# Altium PCB UpperPlumbingBayBoard.PcbDoc (part 1 of 2)
Units mm, origin at the board's own origin, x right, y up, seen from the top; angles counter-clockwise.
Board outline 109.22 x 106.86 mm, 4 copper layers (Top Layer, GND, PWR, Bottom Layer), stack 1.586 mm thick; 63 components, 45 nets, 242 pads, 158 vias.
Unrouted connection lines stored in the file: 2.
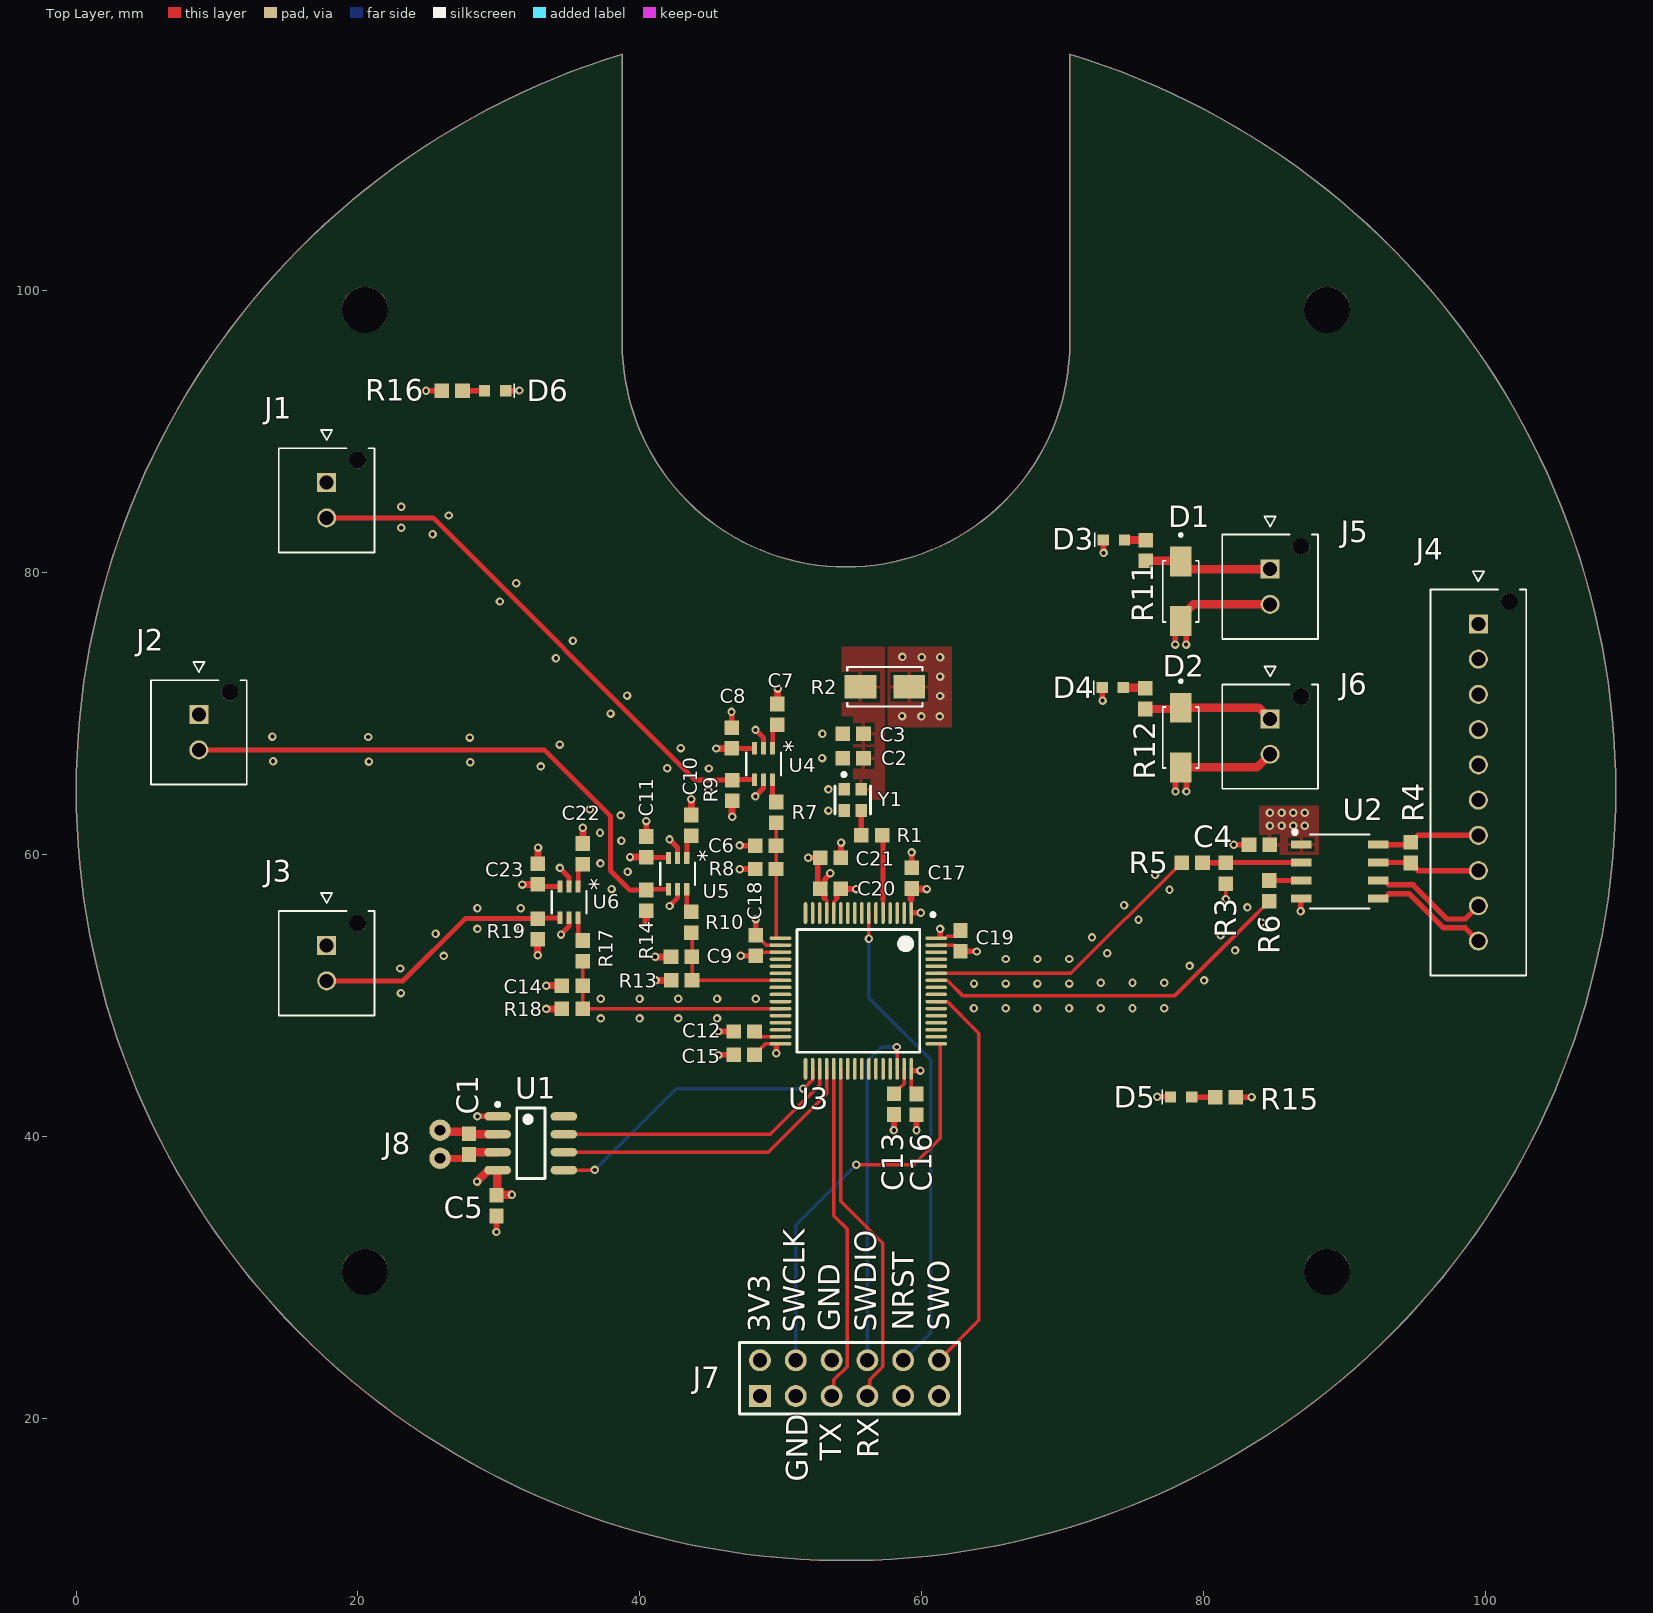
[diagram p0: Top Layer view]
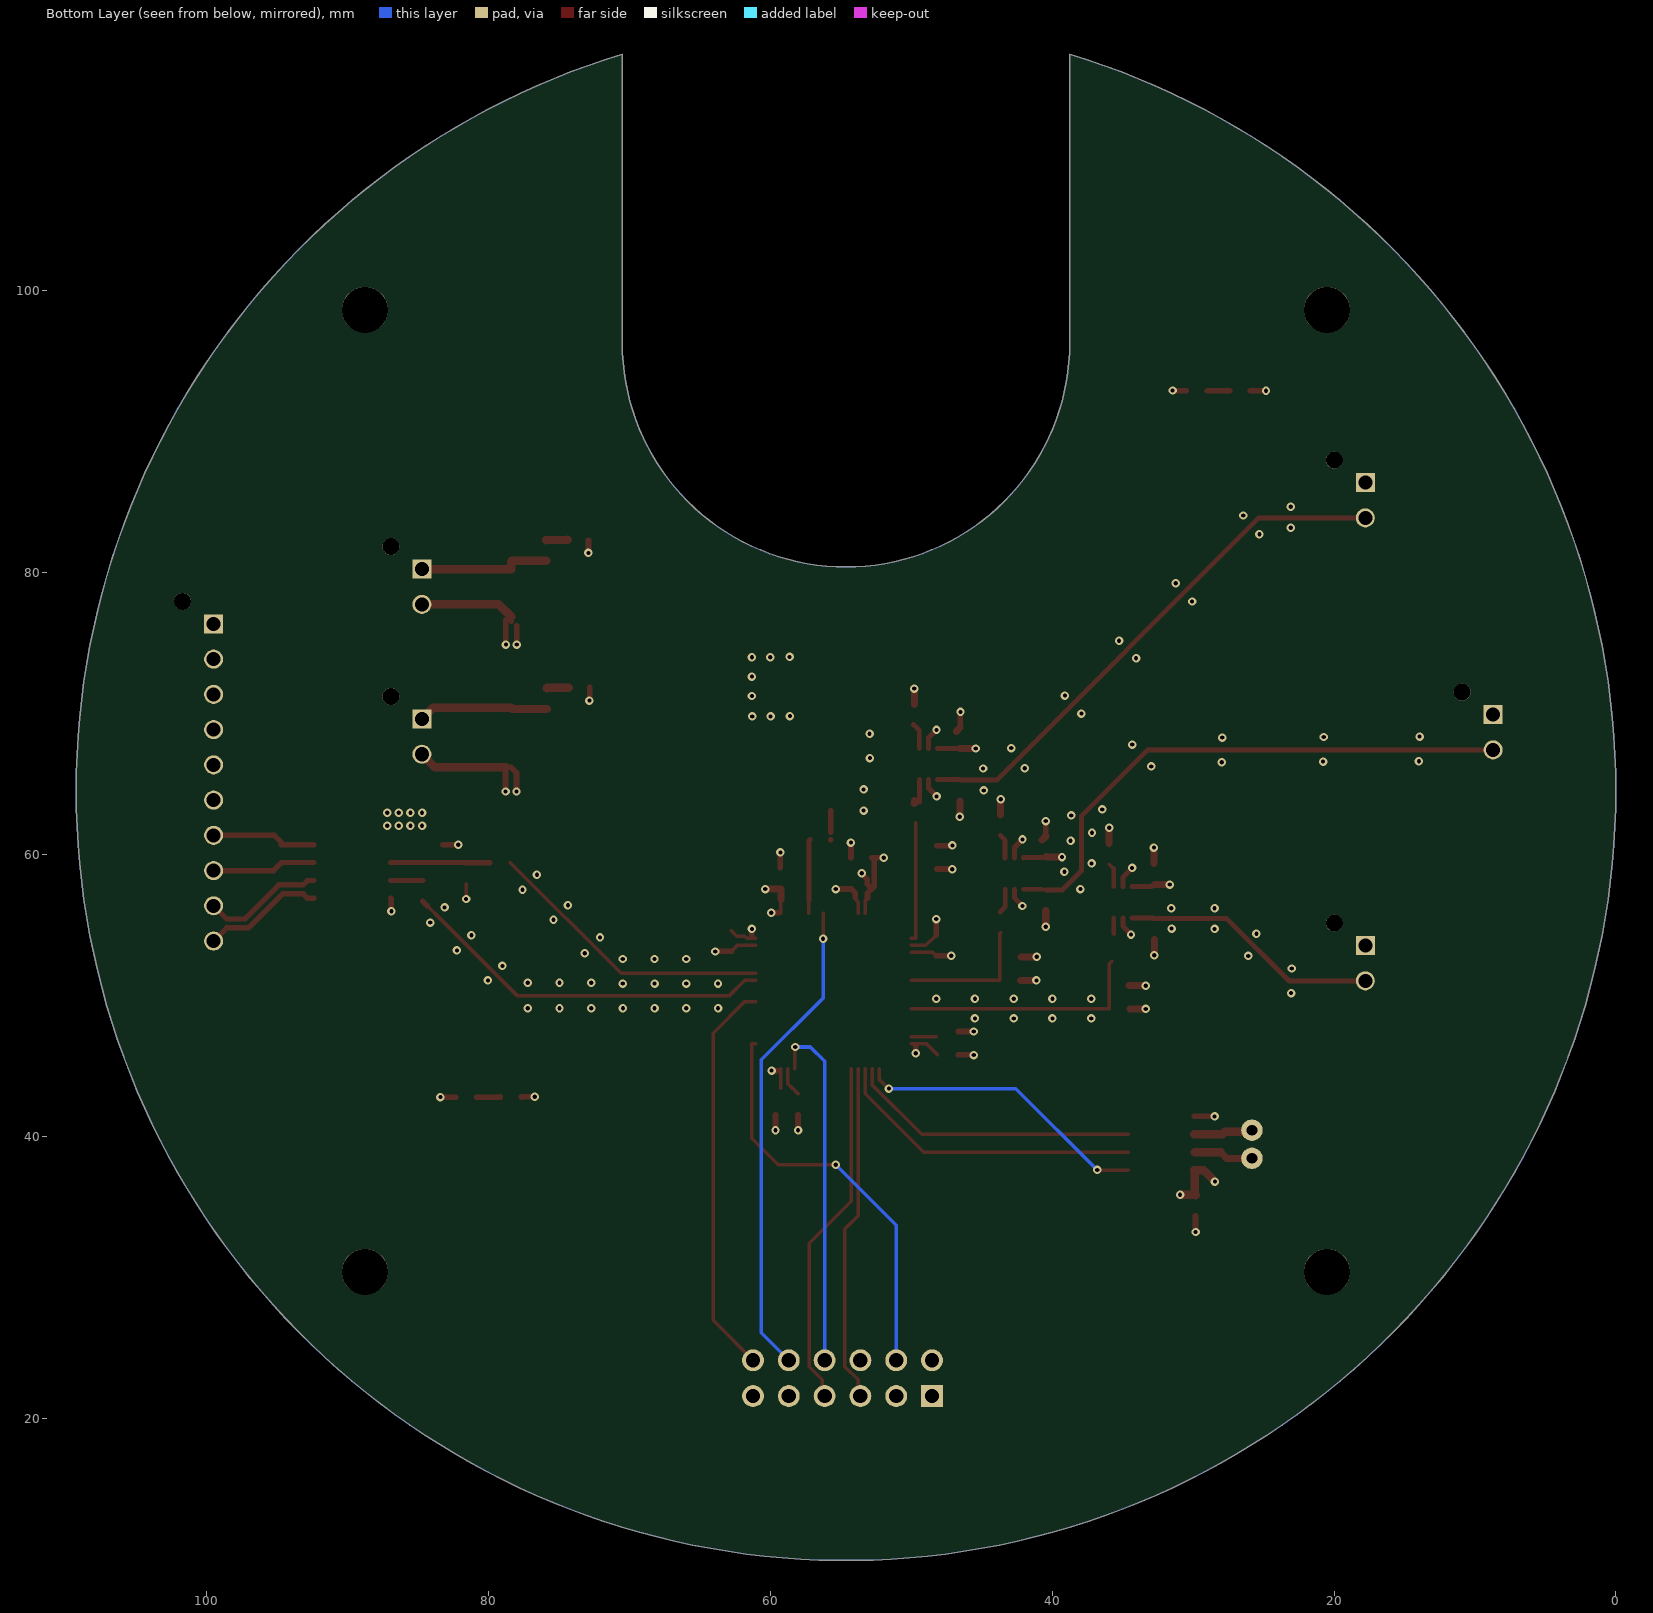
[diagram p1: Bottom Layer view, seen from below]
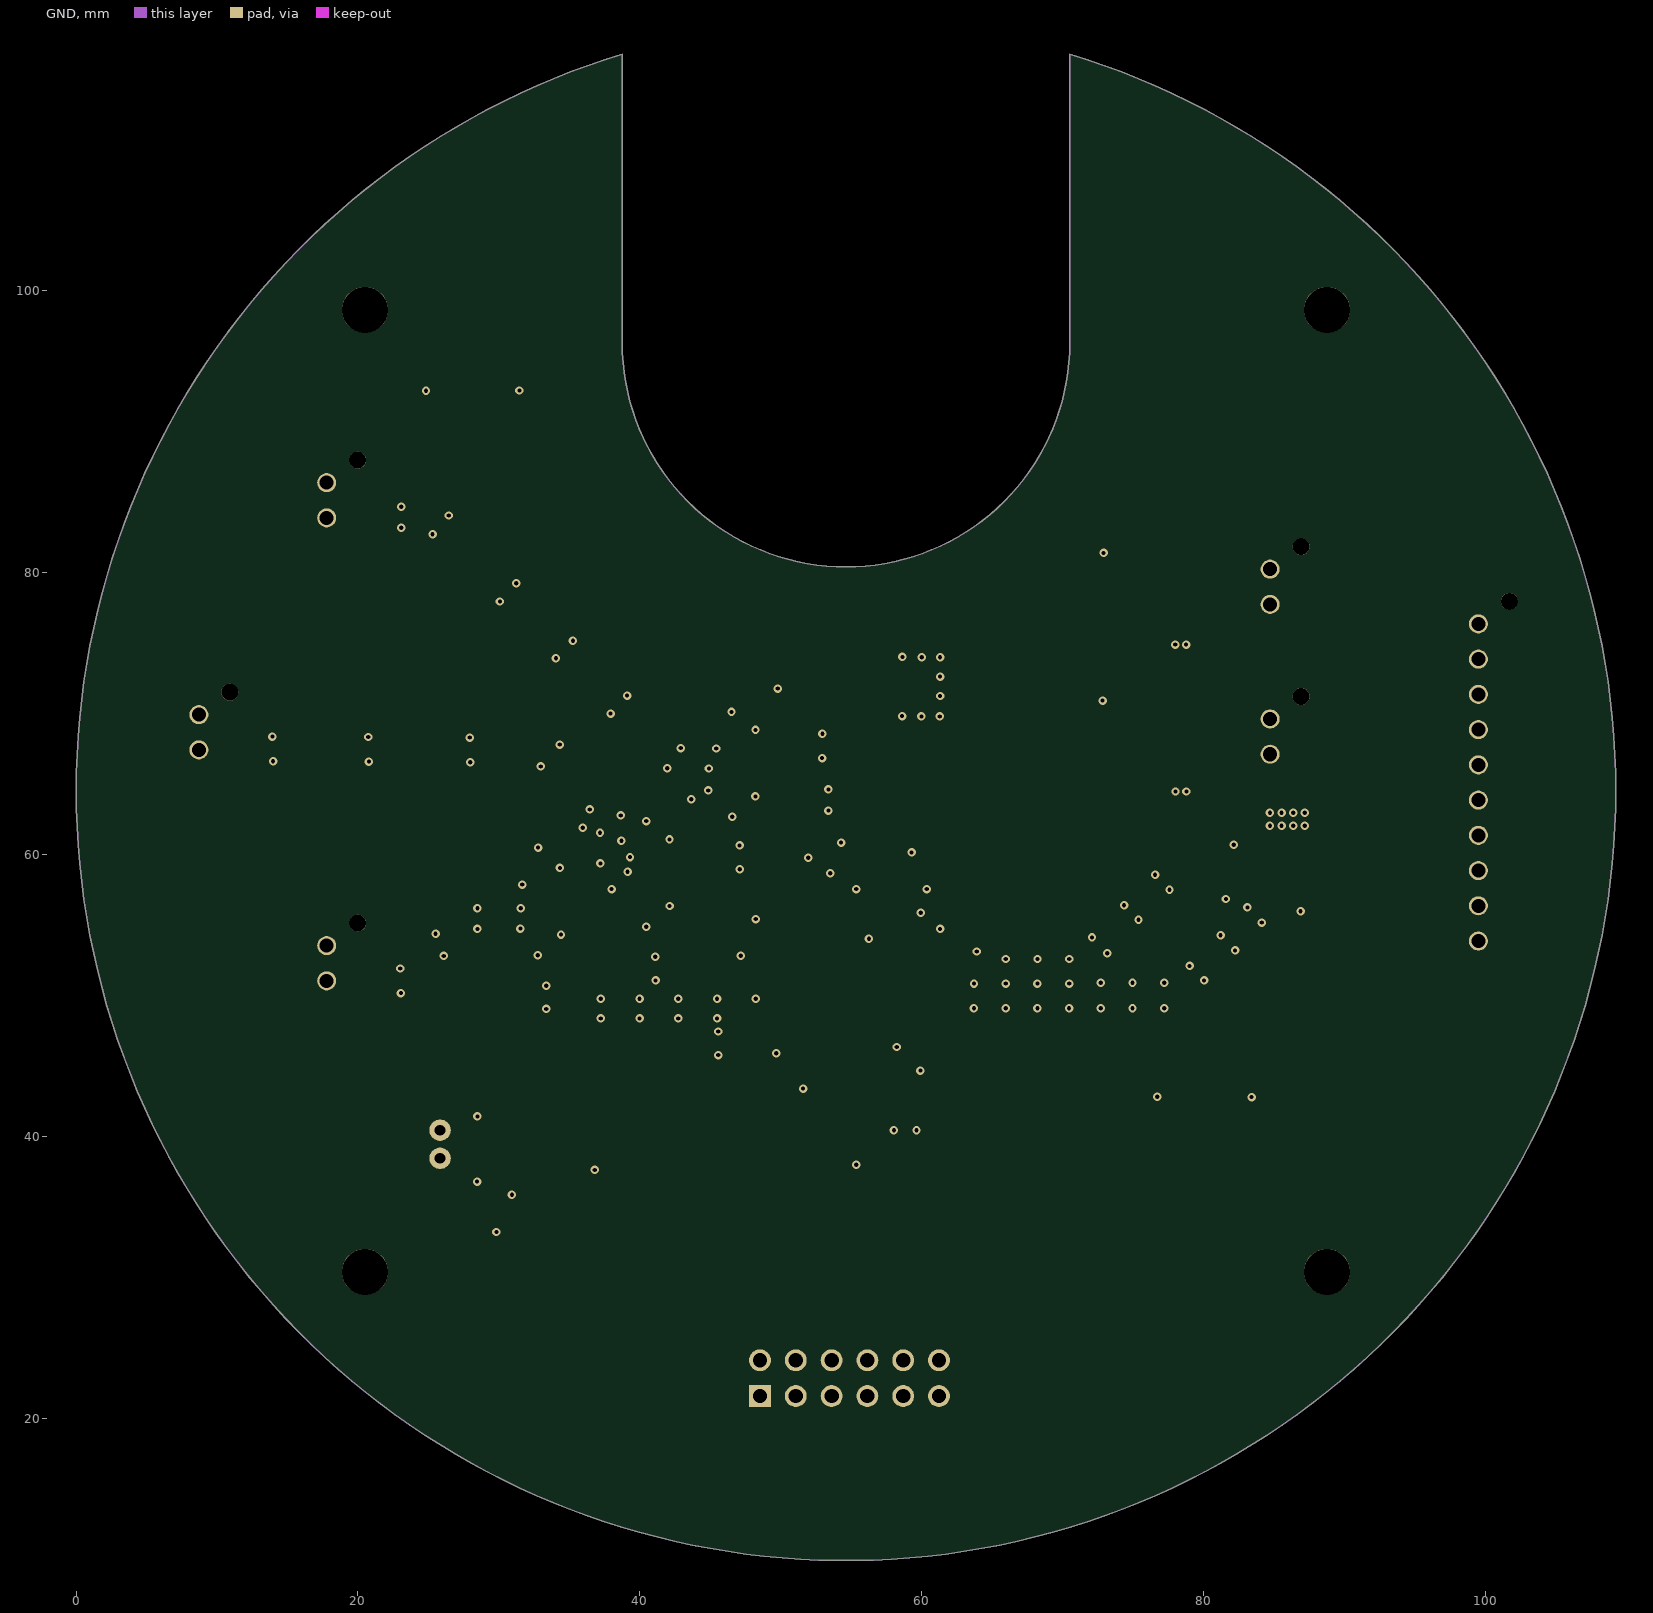
[diagram p2: GND]
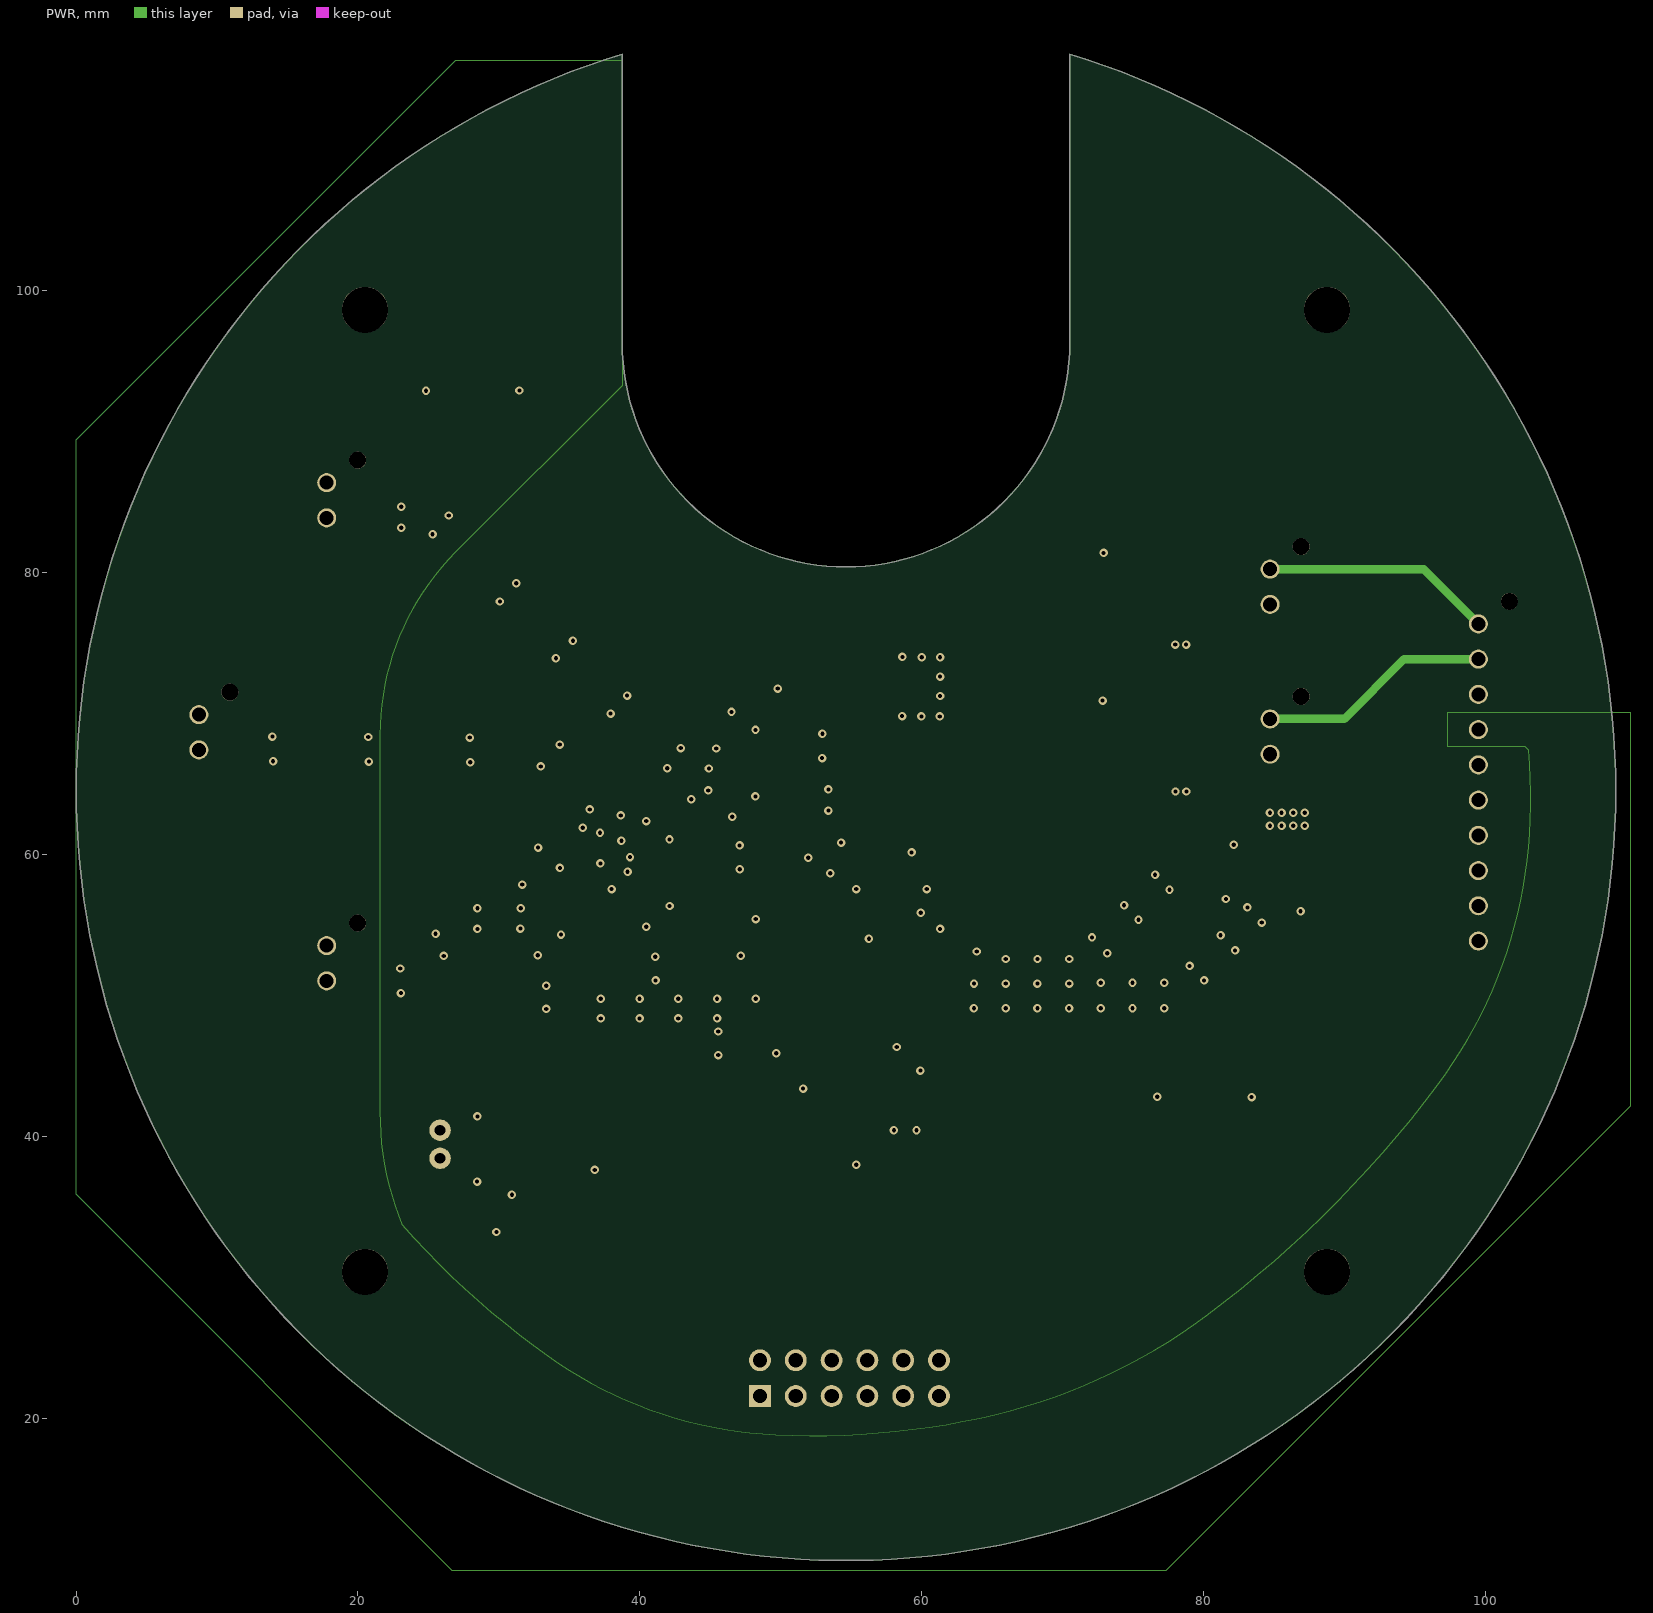
[diagram p3: PWR]

## Layer stack, top to bottom
Top Solder: solder mask 0.0127, Solder Resist, Dk 3.8
Top Layer: signal copper 0.035
Dielectric 1: prepreg 0.2104, 7628, Dk 4.4
GND: signal copper 0.0152
Core: core 1.065, FR-4, Dk 4.6
PWR: signal copper 0.0152
Dielectric 2: prepreg 0.2104, 7628, Dk 4.4
Bottom Layer: signal copper 0.035
Bottom Solder: solder mask 0.0127, Solder Resist, Dk 3.8

## Board outline
38.748,116.755 ccw(c54.623,64.503) 70.498,116.755 70.498,96.253 cw(c54.623,96.253) 38.748,96.253

## Design rules (kind name [scope] priority, off if disabled: settings)
BoardOutlineClearance [All] p1: gap=0.2 ignorepadtopadclearanceinfootprint=FALSE
Clearance [All] p1: gap=0.2 ignorepadtopadclearanceinfootprint=TRUE
ComponentClearance [All] p1: gap=0.102 collisioncheckmode=3 verticalgap=0.102 showdistances=TRUE
DiffPairsRouting [All] p1: maxlimit=0.254 minlimit=0.254 mostfreqgap=0.254 toplayer_minwidth=0.381 toplayer_maxwidth=0.381 toplayer_prefwidth=0.381 midlayer1_minwidth=0.381 midlayer1_maxwidth=0.381 midlayer1_prefwidth=0.381 midlayer2_minwidth=0.381 midlayer2_maxwidth=0.381 midlayer2_prefwidth=0.381 bottomlayer_minwidth=0.381 bottomlayer_maxwidth=0.381 bottomlayer_prefwidth=0.381 maxuncoupledlength=12.7
Height [All] p1: minheight=0 maxheight=1816.048 prefheight=12.7
HoleSize [All] p1: absolutevalues=TRUE maxlimit=6.3 minlimit=0.2 maxpercent=80.000 minpercent=20.000
HoleToHoleClearance [All] p1: gap=0.25 allowstackedmicrovias=FALSE
MinimumAnnularRing [All] p1: minimumring=0.076
MinimumSolderMaskSliver [All] p1: minsoldermaskwidth=0
PlaneClearance [All] p1: clearance=0.102
PlaneConnect PlaneConnectPowerPads [InPadClass('PowerPads')] p1: planeconnectstyle=Direct reliefexpansion=0.508 reliefentries=4 reliefconductorwidth=0.254 reliefairgap=0.254
PlaneConnect [All] p2: pad.planeconnectstyle=Relief pad.reliefexpansion=0.3 pad.reliefentries=4 pad.reliefconductorwidth=0.102 pad.reliefairgap=0.102 via.planeconnectstyle=Direct via.reliefexpansion=0.3 via.reliefentries=4 via.reliefconductorwidth=0.127 via.reliefairgap=0.127
PolygonConnect Vent_Pwr [InNet('VENT_PWR')] p1: thpad.connectstyle=Relief thpad.reliefconductorwidth=0.254 thpad.reliefentries=4 thpad.polygonreliefangle="90 Angle" thpad.airgapwidth=0.254 smdpad.connectstyle=Relief smdpad.reliefconductorwidth=0.254 smdpad.reliefentries=4 smdpad.polygonreliefangle="90 Angle" smdpad.airgapwidth=0.254 via.connectstyle=Direct via.reliefconductorwidth=0.254 via.reliefentries=4 via.polygonreliefangle="90 Angle" via.airgapwidth=0.254
PolygonConnect "Top Layer 5V" [InNet('+5V')] p2: thpad.connectstyle=Relief thpad.reliefconductorwidth=0.254 thpad.reliefentries=4 thpad.polygonreliefangle="90 Angle" thpad.airgapwidth=0.254 smdpad.connectstyle=Relief smdpad.reliefconductorwidth=0.254 smdpad.reliefentries=4 smdpad.polygonreliefangle="90 Angle" smdpad.airgapwidth=0.254 via.connectstyle=Direct via.reliefconductorwidth=0.254 via.reliefentries=4 via.polygonreliefangle="90 Angle" via.airgapwidth=0.254
PolygonConnect ServoPower [InNet('SERVO_PWR')] p3: thpad.connectstyle=Relief thpad.reliefconductorwidth=0.254 thpad.reliefentries=4 thpad.polygonreliefangle="90 Angle" thpad.airgapwidth=0.254 smdpad.connectstyle=Relief smdpad.reliefconductorwidth=0.254 smdpad.reliefentries=4 smdpad.polygonreliefangle="90 Angle" smdpad.airgapwidth=0.254 via.connectstyle=Direct via.reliefconductorwidth=0.254 via.reliefentries=4 via.polygonreliefangle="90 Angle" via.airgapwidth=0.254
PolygonConnect VentPower [InNet('VENT_PWR')] p4: thpad.connectstyle=Direct thpad.reliefconductorwidth=0.254 thpad.reliefentries=4 thpad.polygonreliefangle="90 Angle" thpad.airgapwidth=0.254 smdpad.connectstyle=Relief smdpad.reliefconductorwidth=0.254 smdpad.reliefentries=4 smdpad.polygonreliefangle="90 Angle" smdpad.airgapwidth=0.254 via.connectstyle=Direct via.reliefconductorwidth=0.254 via.reliefentries=4 via.polygonreliefangle="90 Angle" via.airgapwidth=0.254
PolygonConnect Power12V [InNet('+12')] p5: thpad.connectstyle=Relief thpad.reliefconductorwidth=0.254 thpad.reliefentries=4 thpad.polygonreliefangle="90 Angle" thpad.airgapwidth=0.254 smdpad.connectstyle=Relief smdpad.reliefconductorwidth=0.254 smdpad.reliefentries=4 smdpad.polygonreliefangle="90 Angle" smdpad.airgapwidth=0.254 via.connectstyle=Direct via.reliefconductorwidth=0.254 via.reliefentries=4 via.polygonreliefangle="90 Angle" via.airgapwidth=0.254
PolygonConnect DrainPower [InNet('DRAIN_PWR')] p6: thpad.connectstyle=Relief thpad.reliefconductorwidth=0.254 thpad.reliefentries=4 thpad.polygonreliefangle="90 Angle" thpad.airgapwidth=0.254 smdpad.connectstyle=Relief smdpad.reliefconductorwidth=0.254 smdpad.reliefentries=4 smdpad.polygonreliefangle="90 Angle" smdpad.airgapwidth=0.254 via.connectstyle=Direct via.reliefconductorwidth=0.254 via.reliefentries=4 via.polygonreliefangle="90 Angle" via.airgapwidth=0.254
PolygonConnect Servo12V [InNet('SERVO_12V')] p7: thpad.connectstyle=Relief thpad.reliefconductorwidth=0.254 thpad.reliefentries=4 thpad.polygonreliefangle="90 Angle" thpad.airgapwidth=0.254 smdpad.connectstyle=Relief smdpad.reliefconductorwidth=0.254 smdpad.reliefentries=4 smdpad.polygonreliefangle="90 Angle" smdpad.airgapwidth=0.254 via.connectstyle=Direct via.reliefconductorwidth=0.254 via.reliefentries=4 via.polygonreliefangle="90 Angle" via.airgapwidth=0.254
PolygonConnect PowerConnectionServo [InNet('SERVO_12V')] p8: connectstyle=Relief reliefconductorwidth=0.254 reliefentries=4 polygonreliefangle="90 Angle" airgapwidth=0.254
PolygonConnect PowerConnectionGND [InNet('GND')] p9: thpad.connectstyle=Relief thpad.reliefconductorwidth=0.254 thpad.reliefentries=4 thpad.polygonreliefangle="90 Angle" thpad.airgapwidth=0.254 smdpad.connectstyle=Relief smdpad.reliefconductorwidth=0.254 smdpad.reliefentries=4 smdpad.polygonreliefangle="90 Angle" smdpad.airgapwidth=0.254 via.connectstyle=Direct via.reliefconductorwidth=0.254 via.reliefentries=4 via.polygonreliefangle="90 Angle" via.airgapwidth=0.254
PolygonConnect PowerConnection5V [InNet('+5V')] p10: connectstyle=Relief reliefconductorwidth=0.254 reliefentries=4 polygonreliefangle="90 Angle" airgapwidth=0.254
PolygonConnect TOP_3V3 [InNet('+3V3')] p11: thpad.connectstyle=Relief thpad.reliefconductorwidth=0.254 thpad.reliefentries=4 thpad.polygonreliefangle="90 Angle" thpad.airgapwidth=0.254 smdpad.connectstyle=Relief smdpad.reliefconductorwidth=0.254 smdpad.reliefentries=4 smdpad.polygonreliefangle="90 Angle" smdpad.airgapwidth=0.2 via.connectstyle=Direct via.reliefconductorwidth=0.254 via.reliefentries=4 via.polygonreliefangle="90 Angle" via.airgapwidth=0.254
PolygonConnect Oscillator [InNet('NetC2_2')] p12: thpad.connectstyle=Relief thpad.reliefconductorwidth=0.254 thpad.reliefentries=4 thpad.polygonreliefangle="90 Angle" thpad.airgapwidth=0.254 smdpad.connectstyle=Relief smdpad.reliefconductorwidth=0.254 smdpad.reliefentries=4 smdpad.polygonreliefangle="90 Angle" smdpad.airgapwidth=0.254 via.connectstyle=Direct via.reliefconductorwidth=0.254 via.reliefentries=4 via.polygonreliefangle="90 Angle" via.airgapwidth=0.254
RoutingVias [All] p1: holewidth=0.3 width=0.6 viastyle="Through Hole" minholewidth=0.2 minwidth=0.45 maxholewidth=6.3 maxwidth=6.55
SilkToSilkClearance [All] p1: silktosilkclearance=0
SilkToSolderMaskClearance [IsPad] p1: minsilkscreentomaskgap=0.102 clearancetoexposedcopper=TRUE
SolderMaskExpansion [All] p1: expansion=0.075 istentingtop=FALSE
SupplyNets "Schematic Supply Nets_2" [InNet('+12')] p1: voltage=0.000
SupplyNets "Schematic Supply Nets_1" [InNet('GND')] p2: voltage=0.000
SupplyNets "Schematic Supply Nets" [InNet('+3V3')] p3: voltage=0.000
UnRoutedNet [All] p1: checkbadconnections=TRUE
Width [All] p1: maxlimit=1 minlimit=0.2 preferedwidth=0.3 minimp=50.000000 maximp=50.000000 favimp=50.000000
19 further rules are at their usual default settings.

## Classes and differential pairs
differential pair TX: +TX_P -TX_N
differential pair RX: +RX_P -RX_N

## Components (designator, comment, footprint, x,y, rotation, side; value= is the part's Value field where it differs from the comment)
C1 "CGA3E2X7R1H103K080AA" 0603 27.875,39.435 r90 top
C2 "CGA3E2X7R1E104K080AA" 0603 55.125,66.812 r0 top
C3 "CL10A105KP8NNNC" 0603 55.125,68.55 r0 top
C4 "CGA3E2X7R1E104K080AA" 0603 83.95,60.675 r180 top
C5 "CGA3E2X7R1E104K080AA" 0603 29.825,35.075 r270 top
C6 "06031C471JAZ2A" 0603 48.925,60.6 r180 top
C7 "06035A103JAT2A" 0603 49.75,69.925 r90 top
C8 "CGA3E2X7R1E104K080AA" 0603 46.525,68.25 r90 top
C9 "06031C471JAZ2A" 0603 42.94,52.725 r180 top
C10 "06035A103JAT2A" 0603 43.65,62.05 r90 top
C11 "CGA3E2X7R1E104K080AA" 0603 40.45,60.525 r90 top
C12 "C1608X5R1C225K080AB" 0603 47.4,47.425 r0 top
C13 "C1608X5R1C225K080AB" 0603 58.025,42.265 r270 top
C14 "06031C471JAZ2A" 0603 35.2,50.675 r180 top
C15 "CGA3EDX7T1A106M080AU" 0603 47.4,45.775 r180 top
C16 "CGA3E2X7R1E104K080AA" 0603 59.625,42.25 r270 top
C17 "CGA3E2X7R1E104K080AA" 0603 59.275,58.3 r90 top
C18 "CGA3E2X7R1E104K080AA" 0603 48.225,53.525 r90 top
C19 "CGA3E2X7R1E104K080AA" 0603 62.75,53.85 r270 top
C20 "CL10A105KP8NNNC" 0603 53.525,57.55 r0 top
C21 "CGA3E2X7R1H103K080AA" 0603 53.525,59.75 r0 top
C22 "06035A103JAT2A" 0603 35.95,60.025 r90 top
C23 "CGA3E2X7R1E104K080AA" 0603 32.75,58.6 r90 top
D1 "SS14" DIOM4325X250N 78.375,78.65 r270 top
D2 "SS14" DIOM4325X250N 78.375,68.275 r270 top
D3 "LTST-C191KGKT" LTST-C191KGKT 73.625,82.3 r0 top
D4 "LTST-C191KGKT" LTST-C191KGKT 73.55,71.825 r0 top
D5 "LTST-C191KGKT" LTST-C191KGKT 78.4,42.775 r0 top
D6 "LTST-C191KGKT" LTST-C191KGKT 29.725,92.875 r180 top
J1 "533750210" MOLEX_533750210 17.78,86.36 r90 top
J2 "533750210" MOLEX_533750210 8.712,69.901 r90 top
J3 "533750210" MOLEX_533750210 17.78,53.518 r90 top
J4 "533751010" MOLEX_533751010 96.088,78.791 r90 top
J5 "533750210" MOLEX_533750210 84.709,80.224 r90 top
J6 "533750210" MOLEX_533750210 84.709,69.596 r90 top
J7 "TSW-106-07-G-D" SMTC-TSW-106-07-X-D 48.52,21.56 r0 top
J8 "J-2_Position_Direct_Solder_Holes" J-2_Position_Direct_Solder_Holes 25.825,38.425 r90 top
R1 "ERJ-P03F22R1V" 0603 56.45,61.35 r180 top
R2 "PWR2010W5R00JE" BO_PWR2010 57.38,71.875 r0 top
R3 "ERJ-3GEYJ103V" 0603 81.575,58.65 r270 top
R4 "RC0201FR-0788R7L" 0603 94.7,60.11 r90 top
R5 "RC0603JR-070RL" 0603 79.175,59.4 r0 top value=0R
R6 "RC0603JR-070RL" 0603 84.65,57.4 r90 top value=0R
R7 "ERJ-H3EF1301V" 0603 49.675,62.975 r270 top
R8 "ERJ-3GEYJ103V" 0603 48.925,58.95 r0 top
R9 "ERJ-3RQF3R0V" 0603 46.55,64.525 r270 top
R10 "ERJ-H3EF1301V" 0603 43.65,55.175 r270 top
R11 "RT0603BRC07500RL" 0603 75.9,81.55 r90 top
R12 "RT0603BRC07500RL" 0603 75.85,71.04 r90 top
R13 "ERJ-3GEYJ103V" 0603 42.965,51.05 r0 top
R14 "ERJ-3RQF3R0V" 0603 40.45,56.725 r270 top
R15 "ERJ-P03F1000V" 0603 81.55,42.75 r180 top
R16 "RT0603BRC07500RL" 0603 26.675,92.875 r0 top
R17 "ERJ-H3EF1301V" 0603 35.95,53.15 r270 top
R18 "ERJ-3GEYJ103V" 0603 35.2,49.025 r0 top
R19 "ERJ-3RQF3R0V" 0603 32.75,54.7 r270 top
U1 "MAX31855KASA+T" MAXM-S8+4_L 32.258,39.497 r0 top
U2 "SN65HVD1477DR" D8_TEX 89.65,58.775 r0 top
U3 "STM32F405RGT6" STM-LQFP64_L 55.5,50.3 r270 top locked
U4 "TSC213ICT" SC70-6_STM 48.775,66.4 r270 top
U5 "TSC213ICT" SC70-6_STM 42.675,58.625 r270 top
U6 "TSC213ICT" SC70-6_STM 34.975,56.6 r270 top
Y1 "SIT8920BM-73-33N-8.000000" FP-SIT8920BM-73-33N-8_000-MFG 55.1,63.85 r270 top

## Footprints (in the part's own frame and the unit in brackets; to place one, negate y for a bottom-side part, rotate by r counter-clockwise, add the part's x,y. Pads: shape width x height; smd on the part's side, far side on the other; paste and mask are expansions set on the pad)
0603 [mm]
  rect 1.04x1.02 smd: 1(-0.735,0) 2(0.735,0)
  body extent -0.8,-0.4 0.8,0.4, height 0.55
BO_PWR2010 [mm]
  rect 2.25x1.651 smd paste+0 mask+0: 1(-1.73,0) 2(1.73,0)
  silkscreen extent -2.67,-1.4 2.67,1.4, body extent -2.54,-1.27 2.54,1.27, height 3.25
D8_TEX [mil]
  rect 57.5x22 smd paste+0 mask+0: 1(-107.25,75) 2(-107.25,25) 3(-107.25,-25) 4(-107.25,-75) 5(107.25,-75) 6(107.25,-25) 7(107.25,25) 8(107.25,75)
  silkscreen extent -130,-104 84,115, body extent -122,-99 122,99, height 69
DIOM4325X250N [mm]
  rect 2.12x1.5 smd: A(2.115,0) C(-2.115,0)
  silkscreen extent -4.1,-1.28 2.16,1.28, body extent -2.57,-1.29 2.57,1.27, height 2.5
FP-SIT8920BM-73-33N-8_000-MFG [mm]
  rect 0.9x0.8 smd paste+0 mask+0: 1(-0.75,-0.6) 2(0.75,-0.6) 3(0.75,0.6) 4(-0.75,0.6)
  silkscreen extent -1.92,-1.25 1,1.25, body extent -1.3,-1.1 1.3,1.1, height 0.25
J-2_Position_Direct_Solder_Holes [mil]
  round 60 hole 30: 1(0,0) 2(78.74,0)
LTST-C191KGKT [mm] "Green 571nm LED Indication - Discrete 2V 0603"
  rect 0.8x0.8 smd paste-3 mask+0.05: 1(-0.75,0) 2(0.75,0)
  silkscreen extent -1.35,-0.5 -1.35,0.5, body extent -0.8,-0.4 0.8,0.4, height 0.8
MAXM-S8+4_L [mm] "SOIC, 8-Leads, Body 4.9x3.9mm, Pitch 1.27mm, IPC High Density"
  oval 1.9x0.6 smd: U1(-2.35,1.905) U2(-2.35,0.635) U3(-2.35,-0.635) U4(-2.35,-1.905) U5(2.35,-1.905) U6(2.35,-0.635) U7(2.35,0.635) U8(2.35,1.905)
  silkscreen extent -2.47,-2.5 1,2.88, body extent -2,-2.5 2,2.5, height 1.75
MOLEX_533750210 [mm]
  rect 1.35x1.35 / inner round 1.35 / far side rect 1.35x1.35 hole 1 mask+0.076: 1(0,0)
  round 1.35 hole 1 mask+0.076: 2(-2.5,0)
  round 1.2 hole 1.2 unplated mask+0.076: ""(1.6,-2.2)
  silkscreen extent -4.95,-3.4 3.73,3.4, body extent -4.97,-3.4 2.43,3.4, height 11.51
MOLEX_533751010 [mm]
  rect 1.35x1.35 / inner round 1.35 / far side rect 1.35x1.35 hole 1 mask+0.076: 1(-2.45,-3.4)
  round 1.35 hole 1 mask+0.076: 2(-4.95,-3.4) 3(-7.45,-3.4) 4(-9.95,-3.4) 5(-12.45,-3.4) 6(-14.95,-3.4) 7(-17.45,-3.4) 8(-19.95,-3.4) 9(-22.45,-3.4) 10(-24.95,-3.4)
  round 1.2 hole 1.2 unplated mask+0.076: ""(-0.85,-5.6)
  silkscreen extent -27.4,-6.8 1.28,0, body extent -27.45,-6.8 -0.05,0, height 11.52
SC70-6_STM [mil]
  rect 34.5x14 smd paste+0 mask+0: 1(-43.75,25.59) 2(-43.75,0) 3(-43.75,-25.59) 4(43.75,-25.59) 5(43.75,0) 6(43.75,25.59)
  silkscreen extent -32,-49 32,49, body extent -47,-44 47,44, height 41
SMTC-TSW-106-07-X-D [mm] ".025 SQ Post Terminal Strip Assembly, 2x6 Pins, Vertical, 2.54mm Pitch, Male"
  rect 1.55x1.55 hole 1.02: 1(0,0)
  round 1.55 hole 1.02: 2(0,2.54) 3(2.54,0) 4(2.54,2.54) 5(5.08,0) 6(5.08,2.54) 7(7.62,0) 8(7.62,2.54) 9(10.16,0) 10(10.16,2.54) 11(12.7,0) 12(12.7,2.54)
  silkscreen extent -1.46,-1.27 14.16,3.81, body extent -1.27,-1.27 13.97,3.81, height 8.38
STM-LQFP64_L [mm] "Thin QFP, 64-Leads, Body 10x10mm, Pitch 0.5mm, IPC High Density"
  oval 1.55x0.25 smd: 1(-5.525,3.75) 2(-5.525,3.25) 3(-5.525,2.75) 4(-5.525,2.25) 5(-5.525,1.75) 6(-5.525,1.25) 7(-5.525,0.75) 8(-5.525,0.25) 9(-5.525,-0.25) 10(-5.525,-0.75) 11(-5.525,-1.25) 12(-5.525,-1.75) 13(-5.525,-2.25) 14(-5.525,-2.75) 15(-5.525,-3.25) 16(-5.525,-3.75) 33(5.525,-3.75) 34(5.525,-3.25) 35(5.525,-2.75) 36(5.525,-2.25) 37(5.525,-1.75) 38(5.525,-1.25) 39(5.525,-0.75) 40(5.525,-0.25) 41(5.525,0.25) 42(5.525,0.75) 43(5.525,1.25) 44(5.525,1.75) 45(5.525,2.25) 46(5.525,2.75) 47(5.525,3.25) 48(5.525,3.75)
  oval 0.25x1.55 smd: 17(-3.75,-5.525) 18(-3.25,-5.525) 19(-2.75,-5.525) 20(-2.25,-5.525) 21(-1.75,-5.525) 22(-1.25,-5.525) 23(-0.75,-5.525) 24(-0.25,-5.525) 25(0.25,-5.525) 26(0.75,-5.525) 27(1.25,-5.525) 28(1.75,-5.525) 29(2.25,-5.525) 30(2.75,-5.525) 31(3.25,-5.525) 32(3.75,-5.525) 49(3.75,5.525) 50(3.25,5.525) 51(2.75,5.525) 52(2.25,5.525) 53(1.75,5.525) 54(1.25,5.525) 55(0.75,5.525) 56(0.25,5.525) 57(-0.25,5.525) 58(-0.75,5.525) 59(-1.25,5.525) 60(-1.75,5.525) 61(-2.25,5.525) 62(-2.75,5.525) 63(-3.25,5.525) 64(-3.75,5.525)
  silkscreen extent -5.54,-4.35 4.35,5.41, body extent -5,-5 5,5, height 1.6

## Part data
C1 C21: "CAP CER 10000PF 50V X7R 0603", Capacitance=10000pF, Manufacturer="TDK Corporation", Operating Temperature="-55°C ~ 125°C", Package / Case="0603 (1608 Metric)", Supplier Part Number 1=445-5662-1-ND, Temperature Coefficient=X7R, Tolerance=±10%, Voltage - Rated=50V, ComponentLink1description=Datasheet, ComponentLink1URL=https://product.tdk.com/info/en/catalog/spec/mlccspec_automotive_general_en.pdf, Manufacturer Part Number=CGA3E2X7R1H103K080AA, Mounting Type="Surface Mount, MLCC", Size / Dimension="0.063\" L x 0.031\" W (1.60mm x 0.80mm)", Supplier 1=Digi-Key, Thickness (Max)="0.035\" (0.90mm)"
C2 C4 C5 C8 C11 C16 C17 C18 C19 C23: "CAP CER 0.1UF 25V X7R 0603", Capacitance=0.1µF, Manufacturer="TDK Corporation", Operating Temperature="-55°C ~ 125°C", Package / Case="0603 (1608 Metric)", Supplier Part Number 1=445-5667-1-ND, Temperature Coefficient=X7R, Tolerance=±10%, Voltage - Rated=25V, ComponentLink1description=Datasheet, ComponentLink1URL=https://product.tdk.com/info/en/catalog/spec/mlccspec_automotive_general_en.pdf, Manufacturer Part Number=CGA3E2X7R1E104K080AA, Mounting Type="Surface Mount, MLCC", Size / Dimension="0.063\" L x 0.031\" W (1.60mm x 0.80mm)", Supplier 1=Digi-Key, Thickness (Max)="0.035\" (0.90mm)"
C3 C20: "CAP CER 1UF 10V X5R 0603", Capacitance=1uF, Manufacturer="Samsung Electro-Mechanics", Operating Temperature="-55°C ~ 85°C", Package / Case="0603 (1608 Metric)", Supplier Part Number 1=1276-1182-1-ND, Temperature Coefficient=X5R, Tolerance=±10%, Voltage - Rated=10V, ComponentLink1description=Datasheet, ComponentLink1URL=http://www.samsungsem.com/kr/support/product-search/mlcc/__icsFiles/afieldfile/2019/05/10/19-CL10A105KP8NNNC.pdf, Manufacturer Part Number=CL10A105KP8NNNC, Mounting Type="Surface Mount, MLCC", Size / Dimension="0.063\" L x 0.031\" W (1.60mm x 0.80mm)", Supplier 1=Digi-Key, Thickness (Max)="0.035\" (0.90mm)"
C6 C9 C14: library part CGA3E2X7R1E104K080AA, "Multilayer Ceramic Capacitors MLCC - SMD/SMT 100V 470pF X7R 0603 5% Flex Soft", Capacitance=470pF, Manufacturer="TDK Corporation", Operating Temperature="-55°C ~ 125°C", Package / Case="0603 (1608 Metric)", Supplier Part Number 1=445-5667-1-ND, Temperature Coefficient=X7R, Tolerance=±10%, Voltage - Rated=25V, ComponentLink1description=Datasheet, ComponentLink1URL=https://product.tdk.com/info/en/catalog/spec/mlccspec_automotive_general_en.pdf, Manufacturer Part Number=CGA3E2X7R1E104K080AA, Mounting Type="Surface Mount, MLCC", Size / Dimension="0.063\" L x 0.031\" W (1.60mm x 0.80mm)", Supplier 1=Digi-Key, Thickness (Max)="0.035\" (0.90mm)"
C7: "Multilayer Ceramic Capacitors MLCC - SMD/SMT .01UF 50V 5% 0603", Capacitance=0.1µF, Manufacturer="TDK Corporation", Manufacturer Part Number=CGA3E2X7R1E104K080AA, Operating Temperature="-55°C ~ 125°C", Package / Case="0603 (1608 Metric)", Supplier Part Number 1=445-5667-1-ND, Temperature Coefficient=X7R, Tolerance=±10%, Voltage - Rated=25V, ComponentLink1description=Datasheet, ComponentLink1URL=https://product.tdk.com/info/en/catalog/spec/mlccspec_automotive_general_en.pdf, Mounting Type="Surface Mount, MLCC", Size / Dimension="0.063\" L x 0.031\" W (1.60mm x 0.80mm)", Supplier 1=Digi-Key, Thickness (Max)="0.035\" (0.90mm)"
C10 C22: "Multilayer Ceramic Capacitors MLCC - SMD/SMT .01UF 50V 5% 0603", Capacitance=0.01uF, Manufacturer="TDK Corporation", Manufacturer Part Number=CGA3E2X7R1E104K080AA, Operating Temperature="-55°C ~ 125°C", Package / Case="0603 (1608 Metric)", Supplier Part Number 1=445-5667-1-ND, Temperature Coefficient=X7R, Tolerance=±10%, Voltage - Rated=50V, ComponentLink1description=Datasheet, ComponentLink1URL=https://product.tdk.com/info/en/catalog/spec/mlccspec_automotive_general_en.pdf, Mounting Type="Surface Mount, MLCC", Size / Dimension="0.063\" L x 0.031\" W (1.60mm x 0.80mm)", Supplier 1=Digi-Key, Thickness (Max)="0.035\" (0.90mm)"
C12 C13: "CAP CER 2.2UF 16V X5R 0603", Capacitance=2.2uF, Manufacturer="TDK Corporation", Operating Temperature="-55°C ~ 85°C", Package / Case="0603 (1608 Metric)", Supplier Part Number 1=445-5157-1-ND, Temperature Coefficient=X5R, Tolerance=±10%, Voltage - Rated=16V, ComponentLink1description=Datasheet, ComponentLink1URL=https://product.tdk.com/info/en/catalog/spec/mlccspec_commercial_general_midvoltage_en.pdf, Manufacturer Part Number=C1608X5R1C225K080AB, Mounting Type="Surface Mount, MLCC", Size / Dimension="0.063\" L x 0.031\" W (1.60mm x 0.80mm)", Supplier 1=Digi-Key, Thickness (Max)="0.035\" (0.90mm)"
C15: library part CL10A106MP8NNNC, "Multilayer Ceramic Capacitors MLCC - SMD/SMT 0603,X7T,10V,10uF,+/-20%,0.8mm, AEC-Q200", Capacitance=10µF, Manufacturer="Samsung Electro-Mechanics", Operating Temperature="-55°C ~ 85°C", Package / Case="0603 (1608 Metric)", Supplier Part Number 1=1276-1871-1-ND, Temperature Coefficient=X5R, Tolerance=±20%, Voltage - Rated=10V, ComponentLink1description=Datasheet, ComponentLink1URL=https://static6.arrow.com/aropdfconversion/f91a1722e2705c3d73cfb1979021b64ae4055093/19-cl10a106mp8nnnc.pdf, Manufacturer Part Number=CL10A106MP8NNNC, Mounting Type="Surface Mount, MLCC", Size / Dimension="0.063\" L x 0.031\" W (1.60mm x 0.80mm)", Supplier 1=Digi-Key, Thickness (Max)="0.035\" (0.90mm)"
D1 D2: "Schottky Diodes & Rectifiers SMA 40V 1.0A", Package=None, Availability=Unavailable, MP=SS14, Price=None
D3 D4 D5 D6: "LED,  LTST-C191KGKT", Case Code (Imperial)=0603, Case Code (Metric)=1608, Color=Green, Forward Voltage=2V, Lens Color=Colorless, Manufacturer="Vishay Lite-On", Max Operating Temperature=85°C, Max Power Dissipation=75mW, Min Operating Temperature=-55°C, Test Current=20mA, Case/Package=0603, Category=Uncategorized, ComponentLink1description=https://datasheet.ciiva.com/2109/ltst-c191kgkt-2109973.pdf?src-supplier=Digi-Key, ComponentLink1URL=https://datasheet.ciiva.com/2109/ltst-c191kgkt-2109973.pdf?src-supplier=Digi-Key, Dominant Wavelength=571nm, Height=0.65mm, Lead Free="Lead Free", Length=1.6mm, Lens Size=0.8mm, Lens Style=Flat,Rectangular,Colorless, Lens Transparency=Clear, Luminous Intensity=35mcd, Manufacturer Part Number=LTST-C191KGKT, Mount="Surface Mount", Number of LEDs=1, Number of Pins=2, Packaging="Tape and Reel", Pricing="1=0.223, 10=0.1424, 25=0.1365, 100=0.0663, 250=0.0656, 500=0.0612, 1000=0.0451, 2000=0.0464, 3000=0.0448, 5000=0.0403, 10000=0.0363, 25000=0.0323, 50000=0.0316 (USD)", RoHS=Yes, RoHS Compliant=Yes, Series=-, Stock=3111, Supplier 1="Arrow Electronics", Supplier Part Number 1=LTST-C191KGKT, Viewing Angle=130°, Wavelength=574nm, Width=0.8mm
J1 J2 J3 J5 J6: "2.50mm Pitch, Mini-Lock PCB Header, Single Row, Vertical, Through Hole, Tin Plating, Positive Lock, 2 Circuits, Bag, 3.40mm PC Tail Length", Package=None, Availability=Unavailable, MP=533750210, Price=None
J4: "2.50mm Pitch, Mini-Lock PCB Header, Single Row, Vertical, Through Hole with Kinked Pins, Tin Plating, Positive Lock, 10 Circuits, Bag, 3.40mm PC Tail Length", Package=None, Availability=Unavailable, MP=533751010, Price=None
J7: library part SMTC-TSW-106-07-X-D_1, "0.025\" SQ Post Header, Through-hole, Vertical, -55 to 125 degC, 2.54 mm Pitch, 12-Pin, Male, RoHS", Manufacturer=Samtec, Temperature Range="-55 to 125 degC", ComponentLink1description="Manufacturer URL", ComponentLink1URL=http://www.samtec.com, ComponentLink2description=Datasheet, ComponentLink2URL=http://www.samtec.com/documents/webfiles/pdf/TSW_TH.PDF, ComponentLink3Description="Package Specification", ComponentLink3URL=http://www.samtec.com/documents/webfiles/cpdf/TSW-XXX-XX-XXX-X-XX-XXX-MKT.pdf, DatasheetVersion=F-214, Mounting Technology=Through-hole, Orientation=Vertical, PackageDescription=".025[0.64] SQ. Post Terminal Strip Assembly", PackageReference=TSW-106-07-X-D, PackageVersion="DM, 8/1988", PartNumber=TSW-106-07-G-D, Pitch="2.54 mm", RoHS=True
R1: library part ERJ-3EKF38R3V, "Thick Film Resistors - SMD 0603 22.1ohms 0.2W 1% AEC-Q200", Case Code (Imperial)=0603, Case Code (Metric)=1608, Manufacturer=Panasonic, Max Operating Temperature=155°C, Max Power Dissipation=100mW, Min Operating Temperature=-55°C, Package Quantity=1, Resistance=22.1R, Resistance Tolerance=1%, Resistor Type="Thick Film", Supplier Part Number 1=01AC1806, Temperature Coefficient=100ppm/°C, Voltage Rating=75V, Voltage Rating (DC)=50V, Case/Package=0603, Category="Chip SMD Resistors", ComponentLink1description=https://datasheet.ciiva.com/22760/1678782-22760701.pdf?src-supplier=Farnell, ComponentLink1URL=https://datasheet.ciiva.com/22760/1678782-22760701.pdf?src-supplier=Farnell, ComponentLink2description=https://datasheet.ciiva.com/22741/1678782-22741961.pdf?src-supplier=Element14, ComponentLink2URL=https://datasheet.ciiva.com/22741/1678782-22741961.pdf?src-supplier=Element14, ComponentLink3Description=https://datasheet.ciiva.com/24165/aoa0000ce2-24165276.pdf?src-supplier=Mouser, ComponentLink3URL=https://datasheet.ciiva.com/24165/aoa0000ce2-24165276.pdf?src-supplier=Mouser, Construction=Rectangular, Contact Plating=Tin, Depth=0.8mm, Features="Automotive AEC-Q200", Height=0.022inch, Lead Free="Lead Free", Length=0.063inch, Manufacturer Part Number=ERJ-3EKF38R3V, Military Standard=Not, Mount="Surface Mount", Number of Terminations=2, Packaging="Tape and Reel", Power Rating=100mW, Pricing="10=0.04200, 25=0.03500, 50=0.02700, 100=0.01800 (CAD)", Reach SVHC Compliant=Yes, RoHS=Yes, RoHS Compliant=Yes, Series=ERJ, Stock=83770, Supplier 1=Newark, Termination=SMD/SMT, Tolerance=1%, Weight=7.1E-05oz, Width=0.8mm
R2: "Res Wirewound 2010 5 Ohm 5% 1/2W ±50ppm/°C Molded SMD SMD T/R", Case Code (Imperial)=2010, Case Code (Metric)=5025, Manufacturer=Bourns, Max Operating Temperature=155°C, Max Power Dissipation=500mW, Min Operating Temperature=-55°C, Package Quantity=1, Resistance=5R, Resistance Tolerance=5%, Resistor Type=Wirewound, Supplier Part Number 1=05R8093, Temperature Coefficient=50ppm/°C, Threshold Voltage=1.6V, Case/Package=2010, Category="Chip SMD Resistors", ComponentLink1description=https://datasheet.ciiva.com/7986/1727932-7986277.pdf?src-supplier=Element14, ComponentLink1URL=https://datasheet.ciiva.com/7986/1727932-7986277.pdf?src-supplier=Element14, ComponentLink2description=https://datasheet.ciiva.com/22713/1727932-22713400.pdf?src-supplier=Element14, ComponentLink2URL=https://datasheet.ciiva.com/22713/1727932-22713400.pdf?src-supplier=Element14, ComponentLink3Description=https://datasheet.ciiva.com/9122/pwr2010-9122735.pdf?src-supplier=Avnet, ComponentLink3URL=https://datasheet.ciiva.com/9122/pwr2010-9122735.pdf?src-supplier=Avnet, ComponentLink4Description=https://datasheet.ciiva.com/15865/pwr2010-15865624.pdf?src-supplier=Onlinecomponents.com, ComponentLink4URL=https://datasheet.ciiva.com/15865/pwr2010-15865624.pdf?src-supplier=Onlinecomponents.com, ComponentLink5Description=https://datasheet.ciiva.com/2484/pwr2010-2484257.pdf?src-supplier=Digi-Key, ComponentLink5URL=https://datasheet.ciiva.com/2484/pwr2010-2484257.pdf?src-supplier=Digi-Key, ComponentLink6Description=https://datasheet.ciiva.com/2484/pwr2010-2484258.pdf?src-supplier=Digi-Key, ComponentLink6URL=https://datasheet.ciiva.com/2484/pwr2010-2484258.pdf?src-supplier=Digi-Key, ComponentLink7Description=https://datasheet.ciiva.com/2484/pwr2010-2484256.pdf?src-supplier=Digi-Key, ComponentLink7URL=https://datasheet.ciiva.com/2484/pwr2010-2484256.pdf?src-supplier=Digi-Key, Depth=2.54mm, Height=0.148inch, Length=0.2inch, Manufacturer Part Number=PWR2010W5R00JE, Military Standard=Not, Mount="Surface Mount", Number of Pins=2, Number of Terminations=2, Packaging="Cut Tape", Power Rating=500mW, Pricing="1=0.68700, 10=0.68700, 25=0.68700, 50=0.68700, 100=0.68700, 250=0.68700 (CAD)", Reach SVHC Compliant=Yes, RoHS=Yes, Series=PWR2010, Stock=26, Supplier 1=Newark, Technology="WIRE WOUND", Termination=Solder, Tolerance=5%, Width=0.1inch
R3 R8 R13 R18: "SMD Chip Resistor, 10 kOhm, ï¿½ 5%, 100 mW, 0603 [1608 Metric], Thick Film, General Purpose", Manufacturer="Panasonic Electronic Components", Operating Temperature="-55°C ~ 155°C", Package="0603 (1608 Metric)", Power  (W)=0.1W, Resistance=10K, Supplier Part Number 1=P10KGCT-ND, Temperature Coefficient=±200ppm/°C, Tolerance=±5%, ComponentLink1description=Datasheet, ComponentLink1URL=https://industrial.panasonic.com/cdbs/www-data/pdf/RDA0000/DMA0000COL11.pdf, ComponentLink2description="Land Pattern", ComponentLink2URL=https://industrial.panasonic.com/cdbs/www-data/pdf/RDA0000/DMA0000COL17.pdf, Composition="Thick Film", Manufacturer Part Number=ERJ-3GEYJ103V, Supplier 1=Digi-Key
R4: library part ERJ-3GEYJ103V, "Thick Film Resistors - SMD 88.7Ohms 1/20W 0201 1%", Manufacturer="Panasonic Electronic Components", Operating Temperature="-55°C ~ 155°C", Package="0603 (1608 Metric)", Power  (W)=0.1W, Resistance=88.7R, Supplier Part Number 1=P10KGCT-ND, Temperature Coefficient=±200ppm/°C, Tolerance=±5%, ComponentLink1description=Datasheet, ComponentLink1URL=https://industrial.panasonic.com/cdbs/www-data/pdf/RDA0000/DMA0000COL11.pdf, ComponentLink2description="Land Pattern", ComponentLink2URL=https://industrial.panasonic.com/cdbs/www-data/pdf/RDA0000/DMA0000COL17.pdf, Composition="Thick Film", Manufacturer Part Number=ERJ-3GEYJ103V, Supplier 1=Digi-Key
R5: library part RT-0R00-F-1/10W-0603, "RES SMD 0 OHM 1% JUMPER 1/10W 0603", Manufacturer="Stackpole Electronics Inc", Manufacturer Part #=RMCF0603ZT0R00, Supplier Part Number 1=3992146, ComponentLink1description=Datasheet, ComponentLink1URL=https://industrial.panasonic.com/ww/products/resistors/chip-resistors/general-purpose-chip-resistors/models/ERJ2GE0R00X, ComponentLink2description="Manufacturer Website", ComponentLink2URL=https://industrial.panasonic.com/ww/products/resistors/chip-resistors/general-purpose-chip-resistors/models/ERJ2GE0R00X, Distributor=Digikey, Distributor Part #=RMCF0603ZT0R00CT-ND, Part Description="0 Ohms Jumper 0.1W, 1/10W Chip Resistor 0603 (1608 Metric) Automotive AEC-Q200 Thick Film", Supplier 1="Future Electronics"
R6: library part RT-0R00-F-1/10W-0603, "RES SMD 0 OHM 1% JUMPER 1/10W 0603", Manufacturer="Stackpole Electronics Inc", Manufacturer Part #=RMCF0603ZT0R00, ComponentLink1description=Datasheet, ComponentLink1URL=https://industrial.panasonic.com/ww/products/resistors/chip-resistors/general-purpose-chip-resistors/models/ERJ2GE0R00X, ComponentLink2description="Manufacturer Website", ComponentLink2URL=https://industrial.panasonic.com/ww/products/resistors/chip-resistors/general-purpose-chip-resistors/models/ERJ2GE0R00X, Distributor=Digikey, Distributor Part #=RMCF0603ZT0R00CT-ND, Part Description="0 Ohms Jumper 0.1W, 1/10W Chip Resistor 0603 (1608 Metric) Automotive AEC-Q200 Thick Film"
R7 R10 R17: library part PWR2010W5R00JE, "Thick Film Resistors - SMD 0603 1.3KOhm 1% AEC-Q200", Case Code (Imperial)=2010, Case Code (Metric)=5025, Manufacturer=Bourns, Max Operating Temperature=155°C, Max Power Dissipation=500mW, Min Operating Temperature=-55°C, Package Quantity=1, Resistance=1.3K, Resistance Tolerance=5%, Resistor Type=Wirewound, Supplier Part Number 1=05R8093, Temperature Coefficient=50ppm/°C, Threshold Voltage=1.6V, Case/Package=2010, Category="Chip SMD Resistors", ComponentLink1description=https://datasheet.ciiva.com/7986/1727932-7986277.pdf?src-supplier=Element14, ComponentLink1URL=https://datasheet.ciiva.com/7986/1727932-7986277.pdf?src-supplier=Element14, ComponentLink2description=https://datasheet.ciiva.com/22713/1727932-22713400.pdf?src-supplier=Element14, ComponentLink2URL=https://datasheet.ciiva.com/22713/1727932-22713400.pdf?src-supplier=Element14, ComponentLink3Description=https://datasheet.ciiva.com/9122/pwr2010-9122735.pdf?src-supplier=Avnet, ComponentLink3URL=https://datasheet.ciiva.com/9122/pwr2010-9122735.pdf?src-supplier=Avnet, ComponentLink4Description=https://datasheet.ciiva.com/15865/pwr2010-15865624.pdf?src-supplier=Onlinecomponents.com, ComponentLink4URL=https://datasheet.ciiva.com/15865/pwr2010-15865624.pdf?src-supplier=Onlinecomponents.com, ComponentLink5Description=https://datasheet.ciiva.com/2484/pwr2010-2484257.pdf?src-supplier=Digi-Key, ComponentLink5URL=https://datasheet.ciiva.com/2484/pwr2010-2484257.pdf?src-supplier=Digi-Key, ComponentLink6Description=https://datasheet.ciiva.com/2484/pwr2010-2484258.pdf?src-supplier=Digi-Key, ComponentLink6URL=https://datasheet.ciiva.com/2484/pwr2010-2484258.pdf?src-supplier=Digi-Key, ComponentLink7Description=https://datasheet.ciiva.com/2484/pwr2010-2484256.pdf?src-supplier=Digi-Key, ComponentLink7URL=https://datasheet.ciiva.com/2484/pwr2010-2484256.pdf?src-supplier=Digi-Key, Depth=2.54mm, Height=0.148inch, Length=0.2inch, Manufacturer Part Number=PWR2010W5R00JE, Military Standard=Not, Mount="Surface Mount", Number of Pins=2, Number of Terminations=2, Packaging="Cut Tape", Power Rating=500mW, Pricing="1=0.68700, 10=0.68700, 25=0.68700, 50=0.68700, 100=0.68700, 250=0.68700 (CAD)", Reach SVHC Compliant=Yes, RoHS=Yes, Series=PWR2010, Stock=26, Supplier 1=Newark, Technology="WIRE WOUND", Termination=Solder, Tolerance=5%, Width=0.1inch
R9 R14 R19: library part ERJ-3GEYJ103V, "Current Sense Resistors - SMD 0603 3.0ohm 1% Curr Sense AEC-Q200", Manufacturer="Panasonic Electronic Components", Operating Temperature="-55°C ~ 155°C", Package="0603 (1608 Metric)", Power  (W)=0.1W, Resistance=3R, Supplier Part Number 1=P10KGCT-ND, Temperature Coefficient=±200ppm/°C, Tolerance=±5%, ComponentLink1description=Datasheet, ComponentLink1URL=https://industrial.panasonic.com/cdbs/www-data/pdf/RDA0000/DMA0000COL11.pdf, ComponentLink2description="Land Pattern", ComponentLink2URL=https://industrial.panasonic.com/cdbs/www-data/pdf/RDA0000/DMA0000COL17.pdf, Composition="Thick Film", Manufacturer Part Number=ERJ-3GEYJ103V, Supplier 1=Digi-Key
R11 R12 R16: library part RC0603FR-071KL, "Thin Film Resistors - SMD 500 ohm 0.1% 15ppm H igh Stability", Case Code (Imperial)=0603, Case Code (Metric)=1608, Manufacturer=Yageo, Max Operating Temperature=155°C, Max Power Dissipation=100mW, Min Operating Temperature=-55°C, Resistance=500R, Resistance Tolerance=1%, Resistor Type="Thick Film", Supplier Part Number 1=4016291, Temperature Coefficient=100ppm/°C, Voltage Rating=50V, Case/Package=0603, Category="Chip SMD Resistors", ComponentLink1description=https://datasheet.ciiva.com/11808/0900766b80f96399-11808081.pdf?src-supplier=Rs, ComponentLink1URL=https://datasheet.ciiva.com/11808/0900766b80f96399-11808081.pdf?src-supplier=Rs, ComponentLink2description=https://datasheet.ciiva.com/7746/1686128-7746280.pdf?src-supplier=Element14, ComponentLink2URL=https://datasheet.ciiva.com/7746/1686128-7746280.pdf?src-supplier=Element14, ComponentLink3Description=https://datasheet.ciiva.com/7660/1868787-7660790.pdf?src-supplier=Element14, ComponentLink3URL=https://datasheet.ciiva.com/7660/1868787-7660790.pdf?src-supplier=Element14, ComponentLink4Description=https://datasheet.ciiva.com/7983/443971-7983613.pdf?src-supplier=Element14, ComponentLink4URL=https://datasheet.ciiva.com/7983/443971-7983613.pdf?src-supplier=Element14, ComponentLink5Description=https://datasheet.ciiva.com/7746/1738695-7746281.pdf?src-supplier=Element14, ComponentLink5URL=https://datasheet.ciiva.com/7746/1738695-7746281.pdf?src-supplier=Element14, ComponentLink6Description=https://datasheet.ciiva.com/7746/1738695-7746279.pdf?src-supplier=Element14, ComponentLink6URL=https://datasheet.ciiva.com/7746/1738695-7746279.pdf?src-supplier=Element14, ComponentLink7Description=https://datasheet.ciiva.com/8896/pyu-rc0603-51-rohs-l-4-8896106.pdf?src-supplier=Avnet, ComponentLink7URL=https://datasheet.ciiva.com/8896/pyu-rc0603-51-rohs-l-4-8896106.pdf?src-supplier=Avnet, ComponentLink8Description=https://datasheet.ciiva.com/15189/getdatasheetpartid-404327-15189644.pdf?src-supplier=Verical, ComponentLink8URL=https://datasheet.ciiva.com/15189/getdatasheetpartid-404327-15189644.pdf?src-supplier=Verical, Construction=Rectangular, Contact Plating=Tin,Matte, Depth=0.8mm, Features="Moisture Resistant", Height=0.45mm, Lead Free="Lead Free", Length=1.6mm, Manufacturer Part Number=RC0603FR-071KL, Military Standard=Not, Number of Terminations=2, Packaging="Tape and Reel", Power Rating=100mW, Pricing="5000=0.0015, 50000=0.0014, 200000=0.0014, 625000=0.0013, 2000000=0.0012 (USD)", Reach SVHC Compliant=No, RoHS=Yes, RoHS Compliant=Yes, Series=RC, Size Code=0603, Stock=11600000, Supplier 1="Future Electronics", Technology="THICK FILM", Termination=SMD/SMT, Tolerance=1%
R15: library part CRGCQ0402J330R, "Thick Film Resistors - SMD 0603 100ohms 0.2W 1% AEC-Q200", Case Code (Imperial)=0402, Case Code (Metric)=1005, Manufacturer="TE Connectivity", Max Operating Temperature=155°C, Max Power Dissipation=63mW, Min Operating Temperature=-55°C, Ratings=AEC-Q200, Resistance=100R, Temperature Coefficient=100ppm/°C, Tolerance=5%, Case/Package=0402, Category="Chip SMD Resistors", ComponentLink1description=https://4donline.ihs.com/images/VipMasterIC/IC/TYEL/TYEL-S-A0004929575/TYEL-S-A0004929575-1.pdf?hkey=52A5661711E402568146F3353EA87419&src-supplier=Newark, ComponentLink1URL=https://4donline.ihs.com/images/VipMasterIC/IC/TYEL/TYEL-S-A0004929575/TYEL-S-A0004929575-1.pdf?hkey=52A5661711E402568146F3353EA87419&src-supplier=Newark, ComponentLink2description=https://www.te.com/commerce/DocumentDelivery/DDEController?Action=srchrtrv&amp;DocNm=1773204-3&amp;DocType=DS&amp;DocLang=English&src-supplier=Digi-Key, ComponentLink2URL=https://www.te.com/commerce/DocumentDelivery/DDEController?Action=srchrtrv&amp;DocNm=1773204-3&amp;DocType=DS&amp;DocLang=English&src-supplier=Digi-Key, ComponentLink3Description=https://4donline.ihs.com/images/VipMasterIC/IC/TYEL/TYEL-S-A0004929575/TYEL-S-A0004929575-1.pdf?hkey=52A5661711E402568146F3353EA87419&src-supplier=Farnell, ComponentLink3URL=https://4donline.ihs.com/images/VipMasterIC/IC/TYEL/TYEL-S-A0004929575/TYEL-S-A0004929575-1.pdf?hkey=52A5661711E402568146F3353EA87419&src-supplier=Farnell, Features="Moisture Resistant,Automotive AEC-Q200", Manufacturer Part Number=CRGCQ0402J330R, Number of Terminations=2, Packaging="Cut Tape", Pricing="1=0.0576, 10=0.0086, 100=0.0034, 250=0.0033, 500=0.0032, 1000=0.0018, 3000=0.0017, 6000=0.0016, 15000=0.0015 (USD)", RoHS=Yes, RoHS Compliant=Yes, Series=CRGCQ, Stock=20410, Supplier 1="Arrow Electronics", Supplier Part Number 1=CRGCQ0402J330R
U1: library part MAX31855-S8+4_1, "Cold Junction Compensated Thermocouple to Digital Converter, 14 Bits Temperature Resolution, -40 to 125 degC, 8-Pin SOIC (S8+4), Pb-Free, Tape ang Reel", Generic Part Number=MAX31855, Supplier Part Number 1=700-MAX31855KASA+T, Code_JEDEC=MS-012, ComponentLink1description="Manufacturer URL", ComponentLink1URL=http://www.maximintegrated.com/, ComponentLink2description=Datasheet, ComponentLink2URL=http://datasheets.maximintegrated.com/en/ds/MAX31855.pdf, ComponentLink3Description="Package Specification", ComponentLink3URL=http://pdfserv.maximintegrated.com/package_dwgs/21-0041.PDF, DatasheetVersion="Rev. 2", Functions="Thermocouple-to-Digital Converter", Interface=SPI, Mounting Technology="Surface Mount", PackageDescription="8-Pin Small-Outline IC, Narrow, Body 3.9 x 4.9 mm, Pitch 1.27 mm", PackageReference=S8+4, PackageVersion="Rev. D, 10/2012", Packing="Tape ang Reel", Parasite Pwr.=No, PartNumber=MAX31855KASA+T, Supplier 1=Mouser
U2: "3.3V, Full-Duplex RS-485, 16kV IEC ESD, 50Mbps data rate, No Enables 8-SOIC -40 to 125", Mfr_Name="Texas Instruments", Copyright="Copyright (C) 2022 Ultra Librarian. All rights reserved.", Manufacturer_Part_Number=SN65HVD1477DR, RefDes=RefDes, Type=DEV
U3: "IC MCU 32BIT 1MB FLASH 64LQFP", Manufacturer=STMicroelectronics, Operating Temperature="-40°C ~ 85°C (TA)", Package / Case=64-LQFP, Supplier Part Number 1=497-11767-ND, Voltage - Supply (VDD)="1.8V ~ 3.6V", ComponentLink1description=Datasheet, ComponentLink1URL=https://www.st.com/content/ccc/resource/technical/document/datasheet/ef/92/76/6d/bb/c2/4f/f7/DM00037051.pdf/files/DM00037051.pdf/jcr:content/translations/en.DM00037051.pdf, Connectivity="CANbus, I²C, IrDA, LINbus, SPI, UART/USART, USB OTG", Core Processor="ARM® Cortex®-M4", Core Size=32-Bit, Data Converters="A/D 16x12b; D/A 2x12b", Manufacturer Part Number=STM32F405RGT6, Mounting Type="Surface Mount", Number of I/O=51, Oscillator Type=Internal, Peripherals="Brown-out Detect/Reset, DMA, I²S, LCD, POR, PWM, WDT", Program Memory Size="1MB (1M x 8)", Program Memory Type=FLASH, RAM Size="192K x 8", Speed=168MHz, Supplier 1=Digi-Key
U4 U5 U6: "No Description Available", Mfr_Name=STMicroelectronics, RefDes=RefDes, Type=Type
Y1: library part CMP-25149-000010-1, "MEMS OSC XO 8.0000MHZ LVCM LVTTL"

## Free pads (board coordinates)
  round 3.264 hole 3.264 unplated: MH(20.498,30.378) MH(20.498,98.628) MH(88.748,30.378) MH(88.748,98.628)

## Via types
v1: diameter 0.6, hole 0.3, Top Layer to Bottom Layer, tented both sides, 158 vias

## Nets (pads, with @x,y where several pads share a name; then routed paths per layer and width w, separated by ;. In a path a pad name is that pad's centre, name@x,y a point inside that pad or via, vN(x,y) a via of type N, cw(c..) or ccw(c..) an arc to the next point about the centre after c; other vN are vias at no path point)
+3V3: C4.1 C5.1 C8.1 C11.1 C15.1 C16.1 C17.1 C18.1 C19.1 C20.1 C21.1 C23.1 J4.6 J7.2 R2.2 R3.2 R15.1 U1.U4 U2.1 U3.1 U3.13 U3.19 U3.32 U3.48 U3.64 U4.3 U5.3 U6.3 | length 35.1
  Top Layer w0.25: C23.1 C23.1@32.904,57.711 ; C15.1 48.91,46.55 U3.32 ; C18.1 48.485,53.05 U3.19 ; 53.1,56.875 53.25,56.725 U3.13 ; U3.1@59.249,55.817 59.249,56.799 59.25,56.8 ; C16.1@59.25,43.41 U3.48 ; U3.1 U3.1@59.25,55.85 ; U3.64 61.675,54.05 61.815,54.19 62.365,54.19 62.75,54.575 C19.1 ; v1(81.575,56.825) R3.2 ; R15.1 R15.1@82.3,42.765
  Top Layer w0.35: C23.1@32.904,57.711 U6.3 ; C11.1 40.477,59.763 42.022,59.763 42.025,59.76 U5.3 ; v1(45.425,67.5) v1@45.432,67.508 ; C8.1@46.517,67.508 C8.1 46.527,67.513 48.123,67.513 U4.3
  Top Layer w0.4: v1(47.15,52.8) 47.155,52.795 C18.1@48.21,52.795 ; v1(49.675,45.875) U3.32@49.675,46.45 ; v1(51.939,59.75) C21.1 52.625,59.585 52.625,57.715 C20.1 ; 53.1,56.875 53.1,57.24 C20.1 ; v1(53.5,58.65) 53.5,58.596 53.11,58.206 53.11,57.86 52.8,57.55 C20.1 ; U3.48@59.35,44.65 v1(59.9,44.65) ; U3.1@59.35,55.85 v1(59.925,55.85) ; U3.64@61.3,54.15 v1(61.3,54.7) ; R15.1@82.3,42.765 82.303,42.763 83.388,42.763 v1(83.4,42.775)
  Top Layer w0.5: v1(31.65,57.85) 31.658,57.858 C23.1@32.717,57.858 ; v1(39.3,59.8) 39.305,59.795 40.38,59.795 C11.1@40.417,59.832 ; v1@45.432,67.508 C8.1@46.517,67.508 ; 59.25,56.8 59.25,57.54 59.258,57.533 59.269,57.544 60.331,57.544 v1(60.35,57.525)
  Top Layer w0.6: v1(28.45,36.775) 28.45,36.784 29.258,37.592 U1.U4@29.867,37.592 ; C5.1 C5.1@29.865,35.85 ; U1.U4 U1.U4@29.867,37.592 ; v1(30.925,35.85) C5.1@29.865,35.85 ; C5.1@29.865,35.85 29.867,35.852 U1.U4@29.867,37.592
  other v1: 84.7,62.025 85.525,62.025 86.35,62.025 87.175,62.025 84.7,62.95 85.525,62.95 86.35,62.95 87.175,62.95 59.975,69.775 61.275,69.775 58.6,69.8 61.3,71.225 61.3,72.6 60,73.975 61.3,73.975 58.625,74
+12: J1.1 J2.1 J3.1 J4.4 R16.1 | length 1.1
  Top Layer w0.4: v1(24.825,92.875) R16.1
CONDUIT_RX: R5.1 U3.59 | length 20.7
  Top Layer w0.25: U3.59 70.58,51.55 78.43,59.4 R5.1
CONDUIT_TX: R6.1 U3.58 | length 27.3
  Top Layer w0.25: U3.58 61.811,51.05 62.886,49.975 77.96,49.975 83.281,55.296 84.32,56.335 R6.1
  Top Layer w0.381: R6.1@84.32,56.335 84.33,56.335 84.65,56.655 R6.1
DEBUG_RX: J7.7 U3.38 | length 24.9
  Top Layer w0.25: U3.38 54.25,35.38 57.24,32.39 57.24,23.644 56.306,22.71 56.306,21.726 J7.7
DEBUG_TX: J7.5 U3.37 | length 24.1
  Top Layer w0.25: J7.5 53.766,21.726 53.766,22.71 54.7,23.644 54.7,33.41 53.75,34.36 U3.37
GND: C2.1 C3.1 C4.2 C5.2 C6.2 C7.2 C8.2 C9.2 C10.2 C11.2 C12.1 C13.2 C14.2 C15.2 C16.2 C17.2 C18.2 C19.2 C20.2 C21.2 C22.2 C23.2 D1.A D2.A D3.1 D4.1 D5.1 D6.1 J4.3 J4.5 J5.2 J6.2 J7.3 J7.6 R8.1 R9.2 R13.1 R14.2 R18.1 R19.2 U1.U1 U2.4 U3.12 U3.18 U3.60 U3.63 U4.2 U4.5 U5.2 U5.5 U6.2 U6.5 Y1.1 Y1.2 | length 71.1
  Top Layer w0.25: C18.2@48.225,54.25 C18.2 ; C18.2@48.226,54.249 48.61,53.865 48.651,53.865 48.966,53.55 U3.18 ; U3.12 53.75,56.611 53.954,56.815 53.954,56.921 ; U3.63 62.325,53.55 C19.2@62.75,53.125
  Top Layer w0.35: v1(34.325,59.025) 34.972,58.378 34.972,57.714 U6.2 ; v1(34.403,54.303) 34.403,54.325 34.975,54.897 U6.5 ; v1(42.1,61.05) 42.672,60.478 42.672,59.739 U5.2 ; v1(42.103,56.328) 42.103,56.35 42.675,56.922 U5.5 ; v1(48.2,64.1) 48.2,64.122 48.772,64.695 48.772,65.286 U4.5 ; v1(48.203,68.822) 48.775,68.25 U4.2
  Top Layer w0.4: v1(28.475,41.4) 28.476,41.401 29.907,41.401 U1.U1 ; v1(29.825,33.2) C5.2 ; D6.1 30.487,92.887 31.437,92.887 v1(31.45,92.9) ; C11.2 v1(40.45,62.35) ; v1(45.56,45.75) 45.572,45.763 46.653,45.763 C15.2 ; v1(45.56,47.425) C12.1 ; v1(46.5,70.1) 46.513,70.088 46.513,68.997 C8.2 ; v1(47.075,60.625) 47.088,60.613 48.187,60.613 C6.2@48.195,60.605 ; v1(47.087,58.937) 47.1,58.95 R8.1 ; C18.2@48.21,54.275 48.225,54.29 v1(48.225,55.4) ; 53.954,56.921 53.954,57.244 C20.2 54.273,57.537 55.338,57.537 v1(55.35,57.525) ; C21.2 54.268,59.758 54.268,60.818 v1(54.275,60.825) ; v1(58.025,40.425) C13.2 ; C17.2 v1(59.275,60.125) ; v1(59.625,40.425) C16.2 ; C19.2 62.757,53.108 63.892,53.108 v1(63.9,53.1) ; D4.1 72.813,71.813 72.813,70.912 v1(72.825,70.9) ; D3.1@72.887,82.288 72.887,81.388 v1(72.9,81.375) ; v1(76.7,42.8) 76.712,42.788 77.638,42.788 D5.1 ; v1(77.975,74.875) D1.A@77.975,76.21 ; v1(78,64.45) 78,65.785 D2.A 78.775,66.16 v1(78.775,64.45) ; D1.A D1.A@78.375,76.845 ; v1(78.75,74.875) D1.A@78.75,76.585 ; v1(82.125,60.675) C4.2 ; J6.2@84.633,67.02 J6.2 ; v1(86.875,55.95) 86.875,56.819 U2.4
  Top Layer w0.5: v1(32.75,52.835) R19.2 ; C23.2@32.775,59.36 v1(32.775,60.475) ; v1(33.35,49.025) R18.1 ; v1(33.35,50.675) C14.2 ; C14.2@34.532,50.682 C14.2@34.54,50.675 ; C22.2 v1(35.95,61.875) ; v1(40.45,54.86) R14.2 ; C11.2@40.45,61.285 40.45,61.275 C11.2@40.725,61 ; v1(41.09,52.725) C9.2 ; v1(41.115,51.05) R13.1 ; C10.2 v1(43.65,63.9) ; C8.2 C8.2@46.785,68.725 ; v1(46.55,62.66) R9.2 ; C7.2@49.775,70.635 v1(49.775,71.75)
  Top Layer w0.6: D1.A@78.375,76.845 79.254,77.724 J5.2 ; D2.A@78.775,66.16 83.773,66.16 J6.2@84.633,67.02
  other v1: 37.225,48.35 39.975,48.35 42.725,48.35 45.475,48.35 63.7,49.075 65.95,49.075 68.2,49.075 70.45,49.075 72.7,49.075 74.95,49.075 77.2,49.075 37.225,49.75 39.975,49.75 42.725,49.75 45.475,49.75 48.225,49.75 23.05,50.15 63.704,50.821 65.954,50.821 68.204,50.821 70.454,50.821 72.7,50.875 74.95,50.875 77.2,50.875 80.025,51.05 23.006,51.894 79,52.075 65.958,52.567 68.208,52.567 70.458,52.567 26.078,52.782 73.15,52.975 82.225,53.175 72.075,54.1 81.2,54.25 25.503,54.357 28.475,54.7 31.525,54.725 84.125,55.15 75.375,55.35 28.475,56.175 31.55,56.175 83.1,56.225 74.35,56.375 77.575,57.475 37.994,57.531 76.55,58.55 39.125,58.75 37.2,59.35 38.694,60.956 37.169,61.531 38.644,62.756 53.375,63.1 36.444,63.181 44.85,64.525 53.375,64.6 44.894,66.081 41.944,66.106 32.969,66.231 27.969,66.531 20.775,66.575 13.975,66.6 52.925,66.825 42.894,67.531 34.319,67.781 27.925,68.275 20.731,68.319 13.931,68.344 52.95,68.55 37.919,69.981 39.094,71.256 34.044,73.906 35.25,75.15 30.069,77.931 31.225,79.225 25.294,82.706 23.069,83.156 26.444,84.031 23.069,84.656
NetC2_2: C2.2 C3.2 R2.1 Y1.4
NetC7_1: C7.1 U4.1 | length 1.8
  Top Layer w0.35: U4.1 49.425,68.78 49.825,69.18 C7.1@49.825,69.19
NetC10_1: C10.1 U5.1 | length 1.7
  Top Layer w0.35: U5.1 43.328,59.739 43.328,60.993 C10.1
NetC12_2: C12.2 U3.31 | length 1.8
  Top Layer w0.25: C12.2@48.225,47.05 U3.31
NetC13_1: C13.1 U3.47 | length 2.1
  Top Layer w0.25: C13.1 58.025,43.01 58.41,43.395 58.42,43.395 58.75,43.725 U3.47
NetC22_1: C22.1 U6.1 | length 1.7
  Top Layer w0.25: C22.1@35.65,58.99 C22.1
  Top Layer w0.35: U6.1 C22.1@35.625,58.99
NetD3_2: D3.2 R11.2 | length 1.5
  Top Layer w0.6: D3.2 74.383,82.292 75.892,82.292 R11.2
NetD4_2: D4.2 R12.2 | length 1.6
  Top Layer w0.6: D4.2 74.325,71.8 75.825,71.8 R12.2
NetD5_2: D5.2 R15.2 | length 1.7
  Top Layer w0.4: D5.2 79.163,42.763 80.803,42.763 R15.2
NetD6_2: D6.2 R16.2 | length 1.6
  Top Layer w0.4: R16.2 D6.2
NetR1_2: R1.2 Y1.3 | length 1.6
  Top Layer w0.368: Y1.3 55.707,63.092 R1.2@55.707,61.533 ; R1.2@55.707,61.033 R1.2@55.715,61.025
NetR3_1: R3.1 R5.2 U2.2 | length 7.1
  Top Layer w0.381: R5.2 79.91,59.385 R3.1 81.575,59.41 U2.2
NetR6_2: R6.2 U2.3 | length 2.3
  Top Layer w0.381: R6.2 84.65,58.14 U2.3
NetR7_1: R7.1 U4.6 | length 2.1
  Top Layer w0.356: U4.6 49.425,63.71 R7.1
  Top Layer w0.5: R7.1@49.761,63.796 R7.1 R7.1@49.781,63.604
NetR10_1: R10.1 U5.6 | length 1.7
  Top Layer w0.35: U5.6 43.325,56.27 43.675,55.92 R10.1@43.675,55.91
NetR17_1: R17.1 U6.6 | length 1.1
  Top Layer w0.35: R17.1@35.625,54.37 U6.6
NRST: J7.10 U3.7 | length 34.3
  Top Layer w0.25: v1(56.25,54) U3.7 ; J7.10@58.677,24.102 J7.10
  Bottom Layer w0.25: v1(56.25,54) 56.25,49.783 60.625,45.408 60.625,26.045 J7.10
OSC_IN: R1.1 U3.5 | length 5.2
  Top Layer w0.25: U3.5 57.25,56.75
  Top Layer w0.368: R1.1@57.185,61.025 57.25,60.96 57.25,56.75
PT15_ADC: C6.1 R7.2 R8.2 U3.17 | length 8.5
  Top Layer w0.25: R8.2 49.66,54.05 U3.17 ; R8.2@49.675,58.95 49.675,60.6 R7.2
PT15_OUT: J1.2 R9.1 U4.4 | length 38.1
  Top Layer w0.35: J1.2 25.34,83.86 43.94,65.26 R9.1 ; R9.1@46.531,65.289 U4.4
PT16_ADC: C9.1 R10.2 R13.2 U3.23 | length 9.7
  Top Layer w0.25: R10.2 43.7,54.39 R13.2 U3.23
PT16_OUT: J2.2 R14.1 U5.4 | length 39.4
  Top Layer w0.35: J2.2 33.224,67.401 37.9,62.725 37.9,58.85 39.29,57.46 R14.1 ; R14.1@40.709,57.514 U5.4
PT17_ADC: C14.1 R17.2 R18.2 U3.27 | length 17.5
  Top Layer w0.25: R17.2@35.775,52.39 35.935,52.23 R18.2 35.96,49.05 U3.27
PT17_OUT: J3.2 R19.1 U6.4 | length 18.4
  Top Layer w0.35: J3.2 23.197,51.018 27.614,55.435 32.825,55.435 32.852,55.462 34.322,55.462 34.325,55.465 U6.4
RX_N: J4.8 R4.1 U2.7 | length 7.3
  Top Layer w0.381: U2.7 R4.1@94.7,59.41 ; R4.1@94.7,59.365 95.224,58.841 J4.8
RX_P: J4.7 R4.2 U2.8 | length 7.3
  Top Layer w0.381: U2.8 R4.2@94.7,60.68 ; R4.2@94.7,60.855 95.186,61.341 J4.7
"SOL10 PWR": D1.C J4.1 J5.1 R11.1 | length 25.8